# Altium PCB zulu_a7.PcbDoc (part 3 of 4)
Units mm, origin at the board's own origin, x right, y up, seen from the top; angles counter-clockwise.
Board outline 69.85 x 25.4 mm, 6 copper layers (Top Layer, L2-GND, L3-SIG, L4-SIG, L5-VCC3V3, Bottom Layer), stack 1.65 mm thick; 178 components, 177 nets, 839 pads, 534 vias.
Unrouted connection lines stored in the file: 46.
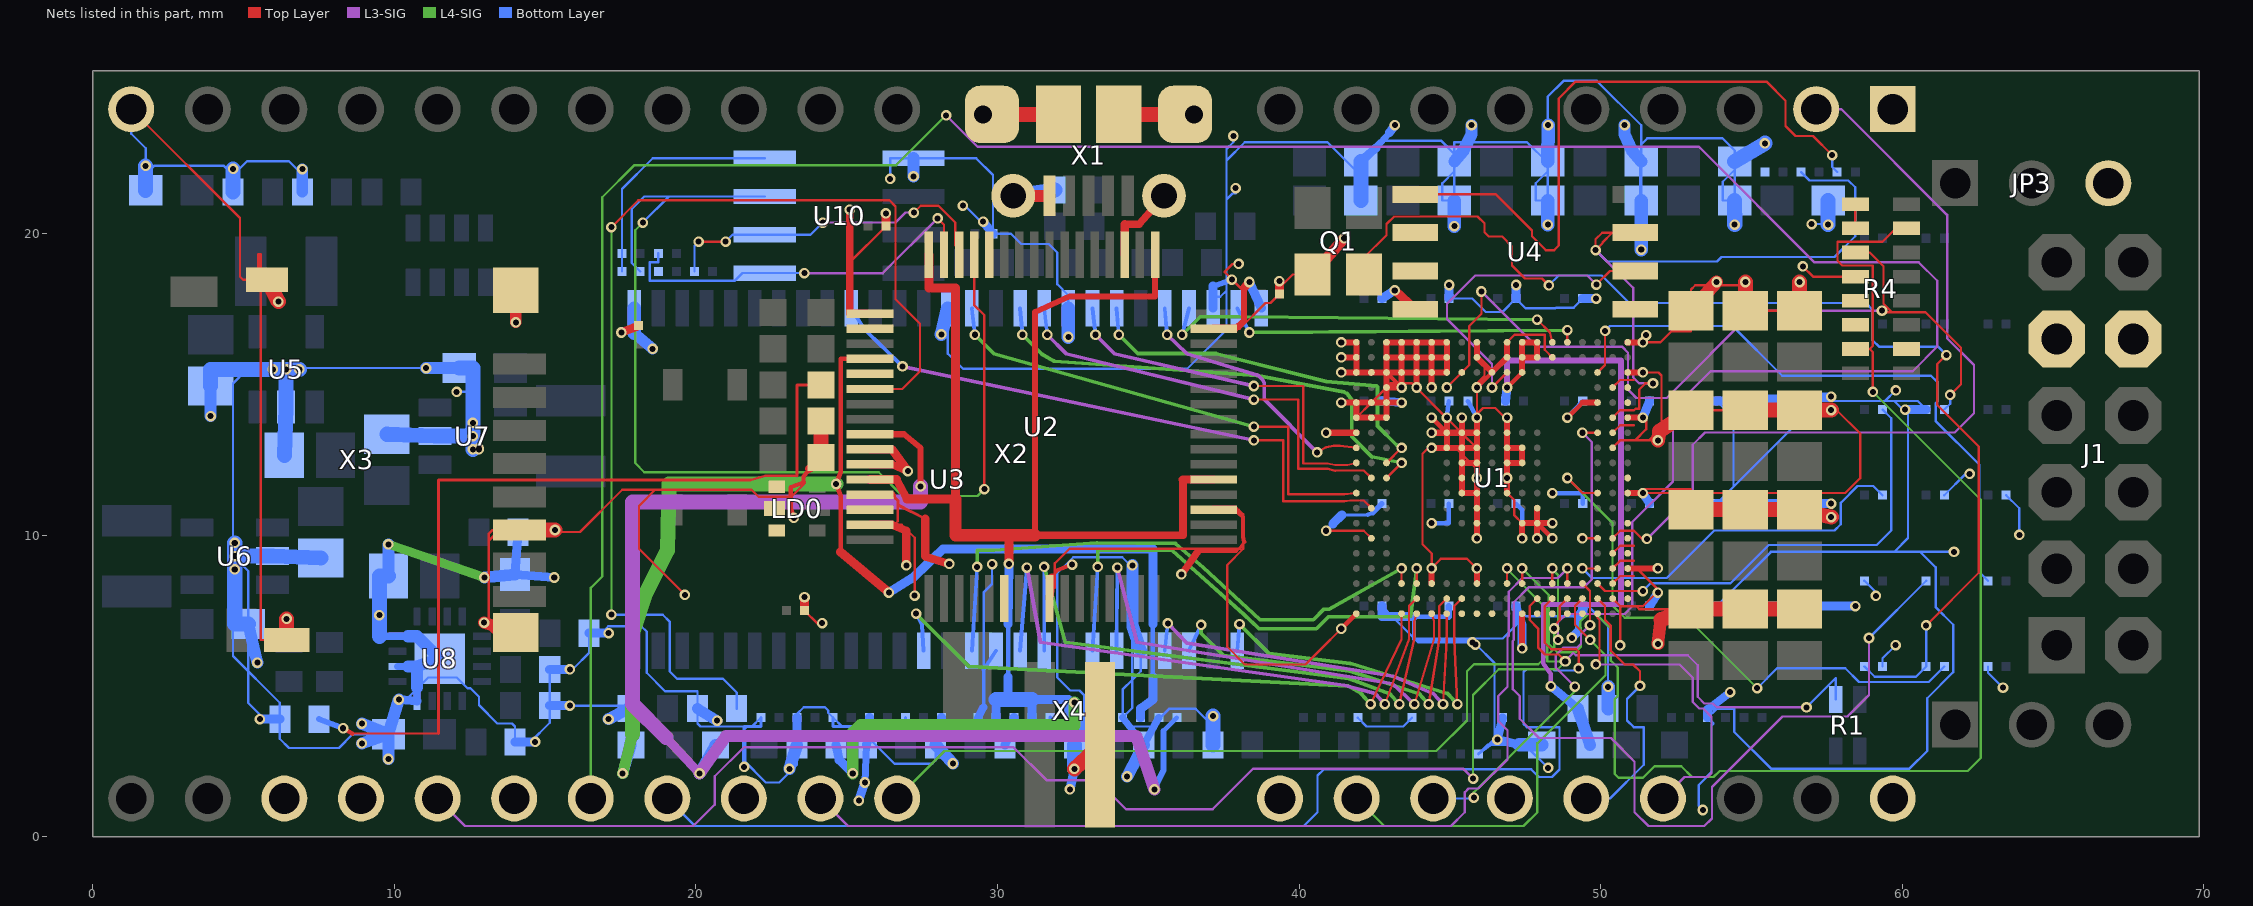
[diagram p6: the nets of this part, all layers, seen from the top]

## Via types
v1: diameter 0.35, hole 0.2, Top Layer to Bottom Layer, tented both sides, 534 vias

## Nets (pads, with @x,y where several pads share a name; then routed paths per layer and width w, separated by ;. In a path a pad name is that pad's centre, name@x,y a point inside that pad or via, vN(x,y) a via of type N, cw(c..) or ccw(c..) an arc to the next point about the centre after c; other vN are vias at no path point) (continued)
CHAN14: U1.W17 X2.24 | length 10.6
  Top Layer w0.076: v1(49.847,5.715) 49.968,5.836 49.968,7.196 49.9,7.264 U1.W17@49.9,7.4
  L3-SIG w0.076: v1(49.847,5.715) 52.624,5.715 53.056,5.283 53.056,4.47 53.27,4.256 53.402,4.256 53.681,3.977 53.681,2.119 53.543,1.981 52.781,1.981 X2.24@52.07,1.27
CHAN15: U1.V17 X2.25 | length 9.2
  Top Layer w0.076: U1.V17@49.9,7.9 50.15,7.65 50.15,7.187 50.343,6.995 50.343,6.172 50.8,5.715 51.079,5.715 51.308,5.486 v1(51.308,5.004)
  Bottom Layer w0.076: X2.25@49.53,1.27 50.317,1.27 51.435,2.388 51.435,3.632 51.105,3.632 50.876,3.861 50.876,4.572 v1(51.308,5.004)
CHAN16: U1.W16 X2.26
CHAN17: U1.U16 X2.27 | length 11
  Top Layer w0.076: U1.U16@49.4,8.4 49.65,8.15 v1(49.65,7.02)
  L3-SIG w0.076: v1(49.149,4.978) 48.514,5.613 48.514,6.02 48.768,6.274 49.227,6.274 49.354,6.401 49.354,6.724 v1(49.65,7.02)
  L4-SIG w0.076: v1(45.796,1.295) 45.796,1.473 49.149,4.826 v1(49.149,4.978)
  Bottom Layer w0.076: X2.27@44.45,1.27 45.771,1.27 v1(45.796,1.295)
CHAN18: U1.V16 X2.28 | length 15.1
  Top Layer w0.076: U1.V16@49.4,7.9 49.15,7.65 49.15,7.187 49.15,7.035 v1(49.657,6.528)
  L4-SIG w0.076: X2.28@41.91,1.27 42.824,0.356 47.447,0.356 47.904,0.813 47.904,3.099 50.165,5.359 50.165,6.02 v1(49.657,6.528)
CHAN19: U1.W15 X2.29
CHAN20: U1.V15 X2.30 | length 26.6
  Top Layer w0.076: v1(48.463,6.909) 48.463,7.001 48.65,7.187 48.65,7.65 U1.V15@48.9,7.9
  L4-SIG w0.076: X2.30@26.67,1.27 28.245,2.845 44.552,2.845 45.568,3.861 45.568,5.486 45.801,5.719 47.934,5.719 48.463,6.248 v1(48.463,6.909)
CHAN21: U1.U15 X2.31 | length 33.1
  Top Layer w0.076: U1.U15@48.9,8.4 v1(48.9,8.9)
  L3-SIG w0.076: X2.31@24.13,1.27 25.044,0.356 45.036,0.356 45.493,0.813 45.493,1.473 45.618,1.599 45.947,1.599 46.914,2.565 46.914,3.534 46.611,3.837 46.611,4.672 46.914,4.975 46.914,6.629 46.953,6.669 46.953,8.128 47.41,8.585 48.585,8.585 v1(48.9,8.9)
CHAN22: U1.W14 X2.32
CHAN23: U1.V14 X2.33 | length 41.3
  Top Layer w0.076: U1.V14@48.4,7.9 48.15,7.65 48.15,7.187 48.15,6.434 48.362,6.223 49.195,6.223 49.276,6.142 v1(49.276,5.588)
  Bottom Layer w0.076: X2.33@19.05,1.27 19.964,0.356 40.157,0.356 40.615,0.813 40.615,2.032 40.818,2.235 47.701,2.235 47.955,1.981 48.387,1.981 48.641,2.235 48.641,3.632 47.549,3.632 47.447,3.734 47.447,5.461 47.549,5.563 48.412,5.563 48.463,5.512 49.2,5.512 v1(49.276,5.588)
CHAN24: U1.U14 X2.34 | length 92.9
  Top Layer w0.076: U1.U14@48.4,8.4 v1(48.4,8.9)
  L3-SIG w0.076: v1(28.296,23.927) 29.337,22.885 53.264,22.885 57.099,19.05 60.554,19.05 61.163,18.44 61.163,16.256 60.35,15.443 53.645,15.443 52.4,14.199 52.4,11.786 51.054,10.439 51.054,7.645 50.8,7.391 48.87,7.391 48.59,7.112 v1(48.59,6.528)
  L4-SIG w0.076: X2.34@16.51,1.27 16.51,8.255 16.891,8.636 16.891,21.209 17.958,22.276 26.645,22.276 v1(28.296,23.927) ; v1(48.4,8.9) 48.387,8.887 48.59,8.684 v1(48.59,6.528)
CHAN25: U1.W13 X2.35
CHAN26: U1.V13 X2.36 | length 47.2
  Top Layer w0.076: U1.V13@47.9,7.9 47.65,7.65 47.65,7.187 47.93,6.908 47.93,6.274 48.158,6.045 48.616,6.045 v1(48.844,5.817)
  L3-SIG w0.076: X2.36@11.43,1.27 12.344,0.356 19.914,0.356 20.625,1.067 20.625,2.007 21.59,2.972 30.531,2.972 31.623,1.88 33.299,1.88 34.265,0.914 37.135,0.914 38.481,2.261 45.441,2.261 v1(45.771,1.93)
  L4-SIG w0.076: v1(45.771,1.93) 45.771,4.699 46.625,5.553 48.581,5.553 v1(48.844,5.817)
CHAN27: U1.T18 X2.37 | length 0.8
  Top Layer w0.076: U1.T18@50.4,8.9 50.65,9.15 51.113,9.15
CHAN28: U1.R19 X2.38
CHAN-CLK: U1.P18 X2.2 | length 27.6
  Top Layer w0.076: U1.P18@50.4,9.9 50.65,10.15 51.113,10.15 51.382,9.881 v1(51.537,9.881)
  L3-SIG w0.076: v1(51.537,9.881) 53.061,11.405 53.061,13.005 53.467,13.411 61.747,13.411 62.382,14.046 62.382,15.646 61.493,16.535 61.493,20.625 57.988,24.13 X2.2@57.15,24.13
CKE: U1.M2 U3.37 | length 20.5
  Top Layer w0.076: v1(38.5,13.15) 39.479,13.15 39.479,11.13 41.5,11.13 41.687,11.15 42.15,11.15 U1.M2@42.4,10.9
  L3-SIG w0.125: v1(26.85,15.6) v1(38.5,13.15)
  Bottom Layer w0.125: U3.37@25.15,17.53 25.575,16.85 v1(26.85,15.6)
CLK-12M-FPGA: R25.2 U1.L17 | length 18.9
  Top Layer w0.076: v1(48.9,11.9) 49.4,11.4 U1.L17@49.9,11.4
  L4-SIG w0.076: v1(48.9,11.9) 50.394,10.406 50.394,7.671 50.8,7.264 52.857,7.264 v1(55.194,4.928)
  Bottom Layer w0.076: v1(55.194,4.928) 55.855,5.588 58.115,5.588 58.572,5.131 60.881,5.131 R25.2@61.4,5.65
CLK-12M-FT: R24.2 U2.2 | length 0.9
  Bottom Layer w0.076: R24.2@59.35,5.65 59.35,5.919 v1(59.787,6.356)
CLK-12M-SHARED: Q1.3 R24.1 R25.1 | length 38
  Top Layer w0.076: Q1.3@42.15,18.65 42.15,19.202 42.901,19.953 42.901,20.32 43.155,20.574 45.923,20.574 46.152,20.345 46.152,20.047 46.291,19.908 46.736,19.908 47.066,19.578 47.066,18.948 47.498,18.517 48.057,18.517 v1(48.285,18.288) ; v1(60.8,7.01) 62.546,8.756 62.546,12.943 61.168,14.321 61.168,15.677 v1(61.468,15.977)
  Bottom Layer w0.076: v1(48.285,18.288) 48.614,18.617 50.04,18.617 50.952,17.704 58.801,17.704 59.03,17.475 59.03,16.459 59.233,16.256 61.189,16.256 v1(61.468,15.977) ; R24.1@58.75,5.65 59.091,5.309 60.459,5.309 R25.1@60.8,5.65 v1(60.8,7.01)
D0: U1.V8 U3.2 | length 12.4
  Top Layer w0.076: v1(45.25,4.4) 45.15,6.55 45.15,7.187 45.15,7.65 U1.V8@45.4,7.9
  L4-SIG w0.125: v1(38.025,7.05) 39,6.075 41.7,5.75 44.925,4.75 v1(45.25,4.4)
  Bottom Layer w0.125: U3.2@37.95,6.17 v1(38.025,7.05)
D1: U1.V7 U3.4 | length 13
  Top Layer w0.076: v1(44.3,4.4) 44.65,6.55 44.65,7.187 44.65,7.65 U1.V7@44.9,7.9
  L4-SIG w0.125: v1(36.75,7.025) 36.75,6.75 37.475,6.025 41.675,5.5 43.975,4.75 v1(44.3,4.4)
  Bottom Layer w0.125: U3.4@36.35,6.17 v1(36.75,7.025)
D2: U1.W7 U3.5 | length 13.7
  Top Layer w0.076: v1(44.775,4.4) 44.9,6.55 U1.W7@44.9,7.4
  L3-SIG w0.125: v1(35.65,7.075) 36.275,6.425 43.125,5.325 44.45,4.75 v1(44.775,4.4)
  Bottom Layer w0.125: U3.5@35.55,6.17 v1(35.65,7.075)
D3: U1.W6 U3.7 | length 18
  Top Layer w0.076: v1(43.825,4.4) 44.475,6.55 44.475,7.15 U1.W6@44.4,7.4
  L3-SIG w0.125: v1(33.975,8.925) 34.625,6.45 43.1,5.075 v1(43.825,4.4)
  Bottom Layer w0.125: U3.7@33.95,6.17 v1(33.975,8.925)
D4: U1.U5 U3.8 | length 17
  Top Layer w0.076: U1.U5@43.9,8.4 v1(43.9,8.9)
  L4-SIG w0.125: v1(33.325,8.95) 33.325,9.5 35.8,9.5 38.175,7.375 38.675,6.9 40.575,6.9 40.975,7.3 43.675,7.3 43.7,7.325 v1(43.9,8.9)
  Bottom Layer w0.125: U3.8@33.15,6.17 v1(33.325,8.95)
D5: U1.W5 U3.10 | length 19.8
  Top Layer w0.076: v1(43.325,4.4) 43.825,6.55 43.825,7.15 U1.W5@43.9,7.4
  L4-SIG w0.125: v1(31.55,8.95) 32.25,6.45 41.65,5.25 43,4.75 v1(43.325,4.4)
  Bottom Layer w0.125: U3.10@31.55,6.17 v1(31.55,8.95)
D6: U1.V5 U3.11 | length 20.7
  Top Layer w0.076: v1(42.85,4.4) 43.65,6.55 43.65,7.187 43.65,7.65 U1.V5@43.9,7.9
  L3-SIG w0.125: v1(30.975,8.925) 31.425,6.45 41.5,5.025 42.525,4.75 v1(42.85,4.4)
  Bottom Layer w0.125: U3.11@30.75,6.17 v1(30.975,8.925)
D7: U1.U4 U3.13 | length 19.4
  Top Layer w0.076: U1.U4@43.4,8.4 v1(43.4,8.9)
  L4-SIG w0.125: v1(29.325,8.95) 29.325,9.5 29.875,9.5 33.3,9.75 35.9,9.725 36.825,8.925 38.7,7.2 40.475,7.2 40.825,7.55 41,7.55 v1(43.4,8.9)
  Bottom Layer w0.125: U3.13@29.15,6.17 v1(29.325,8.95)
D8: U1.L1 U3.42 | length 16.4
  Top Layer w0.076: v1(38.5,13.6) 39.645,13.6 39.645,11.36 41.5,11.36 U1.L1@41.9,11.4
  L4-SIG w0.125: v1(29.25,16.65) 29.875,16.025 v1(38.5,13.6)
  Bottom Layer w0.125: U3.42@29.15,17.53 v1(29.25,16.65)
D9: U1.K3 U3.44 | length 16.2
  Top Layer w0.076: U1.K3@42.9,11.9 v1(43.4,12.4)
  L4-SIG w0.125: v1(30.825,16.65) 31.45,16.025 31.875,15.775 38.6,15.3 41.5,14.75 41.6,14.7 41.75,14.5 41.75,13.275 42.425,12.6 v1(43.4,12.4)
  Bottom Layer w0.125: U3.44@30.75,17.53 v1(30.825,16.65)
D10: U1.K2 U3.45 | length 14.5
  Top Layer w0.076: v1(38.5,14.5) 39.978,14.5 39.978,12.21 40.9,12.21 40.95,12.205 41.2,12.14 41.687,12.15 42.15,12.15 U1.K2@42.4,11.9
  L3-SIG w0.125: v1(31.65,16.65) 32.275,16.025 v1(38.5,14.5)
  Bottom Layer w0.125: U3.45@31.55,17.53 v1(31.65,16.65)
D11: U1.J1 U3.47 | length 12.5
  Top Layer w0.076: v1(38.5,14.95) 40.145,14.95 40.145,12.38 40.95,12.38 41.2,12.33 41.6,12.33 U1.J1@41.9,12.4
  L3-SIG w0.125: v1(33.25,16.65) 33.875,16.025 v1(38.5,14.95)
  Bottom Layer w0.125: U3.47@33.15,17.53 v1(33.25,16.65)
D12: U1.J3 U3.48 | length 12.9
  Top Layer w0.076: U1.J3@42.9,12.4 v1(43.4,12.9)
  L4-SIG w0.125: v1(34.025,16.65) 34.65,16.025 37.25,16.025 40.9,15.1 42.575,14.95 42.6,14.925 42.6,13.625 43.225,13 v1(43.4,12.9)
  Bottom Layer w0.125: U3.48@33.95,17.53 v1(34.025,16.65)
D13: U1.H1 U3.50 | length 9
  Top Layer w0.076: v1(40.6,12.75) 40.9,12.92 41.15,12.97 41.35,12.97 U1.H1@41.9,12.9
  L3-SIG w0.125: v1(35.625,16.65) 36.275,16.025 38.65,15.3 38.8,15.15 38.85,15.05 38.85,14.5 v1(40.6,12.75)
  Bottom Layer w0.125: U3.50@35.55,17.53 v1(35.625,16.65)
D14: U1.A14 U3.51 | length 13.9
  Top Layer w0.076: v1(47.9,17.15) 48.325,16.725 U1.A14@48.4,16.4
  L4-SIG w0.125: v1(36.125,16.65) 36.725,17.25 38,17.25 v1(47.9,17.15)
  Bottom Layer w0.125: v1(36.125,16.65) U3.51@36.35,17.53
D15: U1.A15 U3.53 | length 11.8
  Top Layer w0.076: U1.A15@48.9,16.4 v1(48.9,16.8)
  L4-SIG w0.125: v1(38.35,16.725) v1(48.9,16.8)
  Bottom Layer w0.125: U3.53@37.95,17.53 v1(38.35,16.725)
DONE: R4.2 U2.22
DONE-PU: R4.9 R4.10 | length 0.8
  Top Layer w0.076: R4.10@58.45,20.178 R4.9@58.45,20.978
EE-CLK: R96.1 U2.62 U10.2 | length 11.5
  Top Layer w0.076: v1(20.091,19.736) v1(20.98,19.736) ; v1(27.229,20.701) 27.457,20.93 28.042,20.93 28.6,20.371 28.6,19.609 28.725,19.609 U2.62@28.725,19.3
  L3-SIG w0.076: v1(24.206,20.371) 26.619,20.371 26.949,20.701 v1(27.229,20.701)
  Bottom Layer w0.076: R96.1@19.95,18.75 19.95,19.594 v1(20.091,19.736) ; v1(20.98,19.736) 21.21,19.965 U10.2@22.285,19.965 23.8,19.965 v1(24.206,20.371)
EE-CS: R98.1 U2.63 U10.1 | length 12.9
  Top Layer w0.076: v1(28.011,20.508) 28.225,20.295 U2.63@28.225,19.3
  L3-SIG w0.076: v1(23.597,18.694) 26.197,18.694 v1(28.011,20.508)
  Bottom Layer w0.076: R98.1@18.75,19.35 18.75,19.05 18.466,19.05 18.466,18.437 21.281,18.437 21.539,18.695 U10.1@22.285,18.695 v1(23.597,18.694)
EE-DATA: R101.2 U2.61 U10.3 | length 36.1
  Top Layer w0.076: U2.61@29.225,19.3 29.225,17.638 29.566,17.297 v1(29.566,11.532)
  L4-SIG w0.076: v1(18.237,20.371) 17.983,20.117 17.983,12.395 18.288,12.09 26.06,12.09 26.848,11.303 29.337,11.303 v1(29.566,11.532)
  Bottom Layer w0.076: R101.2@18.15,18.75 17.868,19.032 17.868,20.815 18.288,21.235 19.101,21.235 ; v1(18.237,20.371) 19.101,21.235 ; U10.3@22.285,21.235 19.101,21.235
EE-DATA-DO: R97.1 R101.1 U10.4 | length 7.9
  Bottom Layer w0.076: R101.1@17.55,18.75 R97.1@17.55,19.35 17.55,21.488 18.567,22.505 U10.4@22.285,22.505
FLASH-CS#: R7.1 U1.K19 U4.1 | length 22
  Top Layer w0.076: U4.1@43.85,21.305 46.533,21.305 47.727,20.111 47.727,19.914 48.184,19.456 48.463,19.456 48.614,19.607 48.614,24.486 49.173,25.044 55.499,25.044 56.134,24.409 56.134,23.571 56.464,23.241 57.048,23.241 v1(57.683,22.606)
  Bottom Layer w0.076: v1(57.683,22.606) 57.683,22.216 R7.1@57.849,22.05
FLASH-D00: U1.D18 U4.5 | length 0.8
  Top Layer w0.076: U1.D18@50.4,14.9 50.65,15.15 51.113,15.15
FLASH-D01: U1.D19 U4.2
FLASH-D02: R2.1 U1.G18 U4.3 | length 0.8
  Top Layer w0.076: U1.G18@50.4,13.4 50.65,13.65 51.113,13.65
FLASH-D03: R6.1 U1.F18 U4.7 | length 23
  Top Layer w0.076: U1.F18@50.4,13.9 50.65,14.15 51.113,14.15 51.161,14.199 51.283,14.199 51.283,14.834 51.486,15.037 v1(51.74,15.037) ; U4.7@51.15,20.035 50.388,20.035 ; 50.388,20.035 50.053,20.035 49.835,19.816 v1(49.835,19.456) 50.063,19.685 50.063,19.71 50.388,20.035
  L3-SIG w0.076: v1(49.835,19.456) 51.079,18.212 51.079,15.24 51.283,15.037 v1(51.74,15.037)
  Bottom Layer w0.076: v1(49.835,19.456) 50.214,19.077 53.864,19.077 54.014,19.228 57.76,19.228 58.445,19.914 58.445,21.539 58.217,21.768 56.931,21.768 R6.1@56.649,22.05
FPGA-CCLK: U1.C11 U4.6 | length 11
  Top Layer w0.076: v1(46.4,14.9) U1.C11@46.9,15.4 ; v1(49.86,18.313) 50.312,18.765 U4.6@51.15,18.765
  L3-SIG w0.076: v1(46.4,14.9) 46.4,15.677 44.907,17.17 44.907,17.678 45.847,18.618 49.555,18.618 v1(49.86,18.313)
FPGA-DONE: R4.7 R4.15 U1.U12 | length 47.2
  Top Layer w0.076: U1.U12@47.4,8.4 v1(47.4,8.9) ; R4.15@58.45,16.178 58.928,16.178 ; v1(59.03,14.757) 59.03,16.076 58.928,16.178 ; R4.7@60.15,20.178 59.792,20.178 59.349,19.736 57.861,19.736 57.861,19.101 58.014,18.948 59.03,18.948 59.03,16.28 58.928,16.178
  L4-SIG w0.076: v1(47.4,8.9) 48.285,8.015 48.285,6.401 48.565,6.121 49.175,6.121 49.353,6.299 49.353,6.934 49.327,6.961 49.327,7.137 49.581,7.391 49.86,7.391 50.343,6.909 50.343,5.842 50.571,5.613 50.571,4.674 50.47,4.572 50.47,2.083 50.597,1.956 51.41,1.956 51.791,2.337 52.68,2.337 53.035,1.981 53.746,1.981 53.95,2.184 62.179,2.184 62.611,2.616 62.611,11.176 v1(59.03,14.757)
FPGA-INIT#: R1.1 U1.U11 | length 16.3
  Top Layer w0.076: U1.U11@46.9,8.4 v1(46.9,8.9)
  L3-SIG w0.076: v1(48.819,5.817) 49.098,6.096 49.174,6.02 52.892,6.02 53.222,5.69 53.222,4.642 53.442,4.422 53.721,4.422 53.85,4.293 v1(56.83,4.293)
  L4-SIG w0.076: v1(46.9,8.9) 46.888,8.888 48.235,7.542 48.235,5.817 v1(48.819,5.817)
  Bottom Layer w0.076: v1(56.83,4.293) 57.8,5.262 R1.1@57.8,4.55
FPGA-TCK: R4.11 R5.2 U1.C8 | length 28.5
  Top Layer w0.076: v1(44.9,14.9) U1.C8@45.4,15.4 45.644,15.644 45.644,16.942 46.05,17.348 v1(46.05,18.085) ; R4.11@58.45,19.378 58.928,19.378 59.385,18.921 59.385,17.678 59.665,17.399 ; v1(59.334,17.45) 59.385,17.399 59.665,17.399 ; v1(61.595,14.656) 61.951,15.011 61.951,16.223 60.774,17.399 59.665,17.399
  L3-SIG w0.076: v1(46.05,18.085) 47.879,16.256 50.71,16.256 50.913,16.053 50.913,14.834 51.193,14.554 52.197,14.554 55.093,17.45 v1(59.334,17.45)
  Bottom Layer w0.076: R5.2@61.4,14.17 61.595,14.365 v1(61.595,14.656)
FPGA-TDI: R4.14 U1.W10
FPGA-TDO: R4.13 U1.W8
FPGA-TMS: R4.12 U1.W9 | length 1.9
  Top Layer w0.076: v1(56.708,18.915) 57.044,18.578 R4.12@58.45,18.578
FT-PWREN#: U1.P17 U2.60 | length 0.5
  Top Layer w0.076: v1(49.4,9.9) U1.P17@49.9,9.9
FT-REF: R18.2 U2.6 | length 37.2
  Top Layer w0.076: v1(17.196,20.218) 18.085,21.107 26.416,21.107 26.619,20.904 26.619,17.831 27.432,17.018 27.432,15.443 26.839,14.85 U2.6@25.775,14.85
  L4-SIG w0.076: v1(17.196,7.366) v1(17.196,20.218)
  Bottom Layer w0.076: v1(17.196,7.366) 18.898,7.366 19.126,7.137 19.126,5.486 19.368,5.244 20.892,5.244 21.35,4.787 R18.2@21.35,4.25
FT-RESETN: R19.1 U2.14
FT-VCORE: C139.2 C152.2 C153.2 C154.2 U2.12 U2.37 U2.49 U2.64 | length 57.3
  Top Layer w0.2: 31.237,10 31.237,17.4 32.4,17.92 35.225,17.92 U2.49@35.225,19.3
  Top Layer w0.26: 31.237,10 36.15,10 36.15,11.85
  Top Layer w0.275: 26.65,11.85 27,11.2
  Top Layer w0.28: 36.15,11.85 U2.37@37.175,11.85
  Top Layer w0.3: U2.12@25.775,11.85 26.65,11.85 ; 27,11.2 28.6,11.2 28.6,18.2 27.725,18.2 U2.64@27.725,19.3 ; v1(30.375,9.05) 30.375,10
  Top Layer w0.4: 28.6,11.2 28.6,10 30.375,10 31.237,10
  L4-SIG w0.39: v1(25.2,2.1) 25.2,3.45
  L4-SIG w0.4: 25.2,3.45 25.45,3.7 32.55,3.7 v1(32.55,4.45)
  Bottom Layer w0.15: 30.35,5.3 30.35,7.05
  Bottom Layer w0.29: 24.75,2.55 v1(25.2,2.1)
  Bottom Layer w0.3: C139.2@24.65,3.05 24.75,2.55 ; C152.2@29.949,3.95 29.949,4.55 ; 30.35,4.55 30.35,5.3 ; 30.35,7.05 v1(30.375,9.05) ; C153.2@31.149,3.95 31.149,4.55 32.349,4.55 ; C154.2@32.349,3.95 32.349,4.55 ; v1(32.55,4.45) 32.349,4.55
  Bottom Layer w0.5: 29.949,4.55 30.35,4.55 31.149,4.55
FT-VPHY: C40.2 L4.1 U2.4 | length 41
  Top Layer w0.15: 24.8,9.45 24.8,11.3 v1(24.65,11.7) 24.8,12.1 24.8,15.85 U2.4@25.775,15.85
  Top Layer w0.3: 24.8,9.45 v1(26.4,8.1)
  L4-SIG w0.37: v1(17.57,2.1) 17.9,3.4
  L4-SIG w0.5: 17.9,3.4 17.9,6.8 18.3,8 19.05,9.5 19.1,11.7 v1(24.65,11.7)
  Bottom Layer w0.15: 35.15,5.3 35.15,7.05
  Bottom Layer w0.3: v1(26.4,8.1) 27.2,8.6 28.2,9.55 35.15,9.55 35.15,7.05 ; C40.2@34.749,3.95 34.749,4.25 35.15,4.55 35.15,5.3
  Bottom Layer w0.37: v1(17.57,2.1) L4.1@17.85,3.05
FT-VPLL: C41.2 L5.1 U2.9 | length 43.8
  Top Layer w0.2: U2.9@25.775,13.35 26.9,13.35 27.45,12.9 v1(27.45,11.625)
  L3-SIG w0.3: 19,3.3 v1(20.12,2.1)
  L3-SIG w0.39: v1(20.12,2.1) 21,3.35
  L3-SIG w0.4: 21,3.35 34.6,3.35 v1(35.2,1.575)
  L3-SIG w0.5: 19,3.3 17.9,4.4 17.9,11.1 27.45,11.1 v1(27.45,11.625)
  Bottom Layer w0.15: 35.5,3.5 C41.2@35.949,3.95
  Bottom Layer w0.2: v1(35.2,1.575) 35.5,2.2 35.5,3.5
  Bottom Layer w0.39: v1(20.12,2.1) L5.1@20.65,3.05
GND: C3.1 C4.1 C5.1 C6.1 C7.1 C8.1 C9.1 C11.1 C12.1 C13.1 C38.1 C40.1 C41.1 C78.1 C80.1 C82.1 C84.1 C85.2 C86.2 C87.2 C88.2 C89.2 C90.2 C91.2 C92.2 C93.2 C94.2 C95.2 C96.2 C97.2 C98.2 C99.2 C100.2 C101.2 C102.2 C103.2 C104.2 C105.2 C106.2 C107.2 C108.2 C109.2 C110.2 C111.2 C112.2 C113.2 C114.2 C115.2 C116.2 C117.2 C118.2 C119.2 C120.2 C121.2 C122.2 C133.1 C134.1 C135.1 C136.1 C137.1 C138.1 C139.1 C140.2 C141.2 C142.2 C143.2 C144.2 C145.2 C146.2 C147.1 C148.1 C149.1 C150.1 C151.1 C152.1 C153.1 C154.1 C155.1 C156.1 C157.1 C158.1 C159.1 J1.5 J1.11 JP3.3 L6.1 LD1.K LD2.K Q1.2 R5.1 R11.1 R13.2 R15.1 R17.2 R18.1 R21.1 R22.1 R78.1 R86.1 R102.1 R103.1 R104.1 R105.1 R106.1 U1.A1 U1.A3 U1.A4 U1.A5 U1.A6 U1.A7 U1.A9 U1.A11 U1.A19 U1.B1 U1.B3 U1.B4 U1.B5 U1.B6 U1.B7 U1.B9 U1.B11 U1.B14 U1.C1 U1.C2 U1.C3 U1.C4 U1.C5 U1.C6 U1.C7 U1.C10 U1.C19 U1.D3 U1.E1 U1.E2 U1.E3 U1.E17 U1.F1 U1.F2 U1.F3 U1.F19 U1.G1 U1.G7 U1.G8 U1.G9 U1.G11 U1.H7 U1.H8 U1.H9 U1.H11 U1.H12 U1.H18 U1.J8 U1.J9 U1.J11 U1.J12 U1.K8 U1.L8 U1.L9 U1.L11 U1.L19 U1.M9 U1.M13 U1.N9 U1.N12 U1.N13 U1.P2 U1.T19 U1.U6 U1.U9 U1.V18 U1.W1 U1.W12 U2.1 U2.5 U2.10 U2.11 U2.13 U2.15 U2.25 U2.35 U2.47 U2.51 U3.6 U3.12 U3.28 U3.41 U3.46 U3.52 U3.54 U4.4 U5.2 U6.2 U7.2 U8.4 U8.6 U8.8 U8.17 U10.5 X1.5 X1.MH1 X1.MH2 X1.MP1 X1.MP2 X1.MP3 X1.MP4 X1.MS1 X1.MS2 X2.1 X2.20 X2.21 X3.6 X3.G1 X3.G2 X3.G3 X3.G4 X4.2 | length 688.8
  Top Layer w0.076: X2.20@1.27,24.13 4.877,20.523 4.877,18.577 4.978,18.475 X3.G3@5.486,18.475 ; X3.G3@5.775,18.475 X3.G3@5.563,18.475 ; X3.G2@6.425,6.525 5.563,6.525 X3.G3@5.563,18.475 ; X3.G1@14.025,6.775 13.266,6.775 13.132,6.909 v1@13.132,7.1 ; X3.6@14.15,10.175 13.248,10.175 13.132,10.058 v1@13.132,7.1 ; v1(19.634,8.026) 18.11,9.55 18.11,10.973 18.644,11.506 ; C159.1@23.6,7.5 24.013,7.087 v1(24.181,7.087) ; LD1.K@24.15,12.585 23.571,12.006 23.571,11.684 23.165,11.278 22.073,11.278 21.844,11.506 18.644,11.506 ; U2.15@25.775,10.35 26.5,10.35 26.581,10.35 ; U2.13@25.775,11.35 26.5,11.35 26.594,11.35 26.594,11.227 26.695,11.125 26.695,10.465 26.581,10.35 ; U2.1@25.775,17.35 25.1,17.35 25.095,17.35 25.095,19.045 C155.1@26.3,20.25 ; v1(27.254,8.001) 27.254,9.918 26.822,10.35 26.581,10.35 ; U2.25@31.725,7.9 31.725,8.255 31.902,8.255 31.902,9.068 32.385,9.55 38.049,9.55 38.151,9.652 ; U2.35@37.175,10.85 37.85,10.85 37.998,10.85 38.151,10.698 38.151,9.743 38.151,9.652 ; U2.47@37.175,16.85 U2.47@37.846,16.85 ; 37.93,9.47 38.056,9.622 38.18,9.78 ; v1(37.998,18.999) 37.795,18.999 37.541,18.745 37.541,18.72 38.176,18.085 38.176,17.18 U2.47@37.846,16.85 ; Q1.2@40.45,18.65 39.788,18.65 39.35,18.212 C157.1@39.35,18 39.054,17.704 38.887,17.704 38.034,16.85 U2.47@37.846,16.85 ; v1(40.9,10.15) 42.15,10.15 U1.P2@42.4,9.9 ; U1.W1@41.9,7.4 40.215,5.715 38.202,5.715 37.617,6.299 37.617,9.017 38.151,9.55 38.151,9.652 ; U1.F1@41.9,13.9 U1.E2@42.4,14.4 U1.D3@42.9,14.9 43.037,15.037 43.748,15.037 43.892,14.892 44.893,13.892 44.9,13.885 45.385,13.4 45.392,13.392 45.885,12.9 45.9,12.885 U1.J9@45.9,12.4 ; U1.U6@44.4,8.4 v1(44.4,8.9) v1@44.4,8.916 ; U1.U9@45.9,8.4 45.9,8.888 45.568,9.22 44.704,9.22 v1@44.4,8.916 ; U1.N9@45.9,10.4 U1.M9@45.9,10.9 U1.L9@45.9,11.4 v1(45.9,11.9) ; U1.B9@45.9,15.9 46.152,15.648 46.152,15.291 45.9,15.039 v1(45.9,14.9) v1@45.9,14.021 ; U1.A11@46.9,16.4 47.15,16.65 48.15,16.65 48.15,16.15 U1.B14@48.4,15.9 ; U1.N12@47.4,10.4 47.142,10.658 47.142,11.158 U1.L11@46.9,11.4 v1(46.9,11.9) U1.J11@46.9,12.4 U1.H11@46.9,12.9 U1.G11@46.9,13.4 46.9,13.831 46.507,14.224 46.103,14.224 v1@45.9,14.021 ; v1(50.65,6.35) 50.65,7.65 U1.V18@50.4,7.9 50.655,7.645 51.187,7.645 ; U1.T19@50.9,8.9 51.206,8.9 51.892,8.214 51.892,8.128 51.41,7.645 51.187,7.645 ; U1.L19@50.9,11.4 v1@51.278,11.4 ; U1.F19@50.9,13.9 51.391,13.834 51.511,13.818 51.511,13.513 51.156,13.157 ; U1.C19@50.9,15.4 v1(51.4,15.4) 51.918,15.4 52.019,15.298 52.019,13.564 51.613,13.157 ; U1.A19@50.9,16.4 v1(51.4,16.4) v1@51.477,16.4 ; v1(51.511,16.637) 51.511,16.434 v1@51.477,16.4 ; v1(51.9,13.15) 50.65,13.15 U1.H18@50.4,12.9 50.657,13.157 51.156,13.157 ; C140.2@53,7.55 51.283,7.55 51.187,7.645 ; C143.2@53,10.849 C143.2@53,11.4 ; C98.2@56.6,17.449 C97.2@54.8,17.449 54.8,18.186 54.695,18.292 53.141,18.292 53,18.151 C93.2@53,17.449 53,16.764 52.349,16.764 51.985,16.4 v1@51.477,16.4 ; X3.G3@5.486,18.475 5.486,19.329 5.563,19.329 X3.G3@5.563,18.475 ; X3.G3@5.486,18.475 X3.G3@5.563,18.475 ; v1@13.132,7.1 13.132,9.83 13.411,10.109 15.325,10.109 16.154,10.109 17.551,11.506 18.644,11.506 ; v1@44.4,8.916 44.4,9.398 44.094,9.704 44.094,12.7 44.298,12.903 45.189,12.903 45.4,12.692 45.9,12.192 ; v1(45.9,11.9) U1.J9@45.9,12.4 ; v1(45.9,11.9) 45.9,12.192 ; 45.9,12.192 U1.J9@45.9,12.4 ; U1.J9@45.9,12.4 U1.H9@45.9,12.9 U1.G9@45.9,13.4 v1(45.9,13.9) v1@45.9,14.021 ; 51.156,13.157 51.613,13.157 ; v1@51.278,11.4 51.41,11.532 53,11.532 C143.2@53,11.4 ; v1@51.278,11.4 C143.2@53,11.4 ; 51.613,13.157 51.892,13.157 52.884,14.149 C146.2@53,14.149 C85.2@54.8,14.149 C86.2@56.6,14.149 57.835,14.149 58.61,13.374 58.61,11.895 58.115,11.4 C143.2@53,11.4
  Top Layer w0.1: U2.13@26.5,11.35 26.7,11.15 26.7,11 27.6,10.55
  Top Layer w0.105: 36.65,9.47 37.93,9.47
  Top Layer w0.11: U2.25@31.8,8.6 32,8.85
  Top Layer w0.13: U2.35@37.85,10.85 38.14,10.6 38.14,9.95
  Top Layer w0.14: 23.57,11.75 23.57,11.95 LD1.K@23.76,12.2 ; 38.14,9.95 38.18,9.78
  Top Layer w0.145: 32,8.85 v1(32.475,9.025)
  Top Layer w0.15: v1(23.25,10.575) 23.15,10.9 23.15,11.6 23.57,11.75 ; v1(41.4,6.9) U1.W1@41.9,7.4 ; U1.C3@42.9,15.4 v1(43.4,14.9) ; v1(44.4,13.9) U1.G7@44.9,13.4 ; v1(45.9,14.9) U1.C10@46.4,15.4 ; U1.N13@47.9,10.4 v1(48.4,9.9) ; v1(48.9,13.9) 49.4,14.4
  Top Layer w0.18: U2.47@37.85,16.85 38.175,17.125
  Top Layer w0.2: v1(40.9,13.4) U1.G1@41.9,13.4 ; v1(41.4,14.4) U1.E1@41.9,14.4 ; v1(41.4,15.4) U1.C1@41.9,15.4 ; v1(41.4,15.9) U1.B1@41.9,15.9 ; v1(41.4,16.4) U1.A1@41.9,16.4 U1.B1@41.9,15.9 ; v1(43.4,14.4) U1.E3@42.9,14.4 ; v1(43.9,14.9) U1.C5@43.9,15.4 ; U1.U6@44.4,8.4 v1(44.4,8.9) ; v1(44.4,12.9) U1.H7@44.9,12.9 ; v1(44.4,13.4) U1.G7@44.9,13.4 ; v1(44.4,14.9) U1.C6@44.4,15.4 ; v1(44.9,13.9) U1.G7@44.9,13.4 ; v1(45.4,13.9) U1.G8@45.4,13.4 ; U1.U9@45.9,8.4 v1(45.9,8.9) ; v1(45.9,9.9) U1.M9@45.9,10.9 U1.L9@45.9,11.4 ; v1(45.9,13.9) U1.G9@45.9,13.4 ; U1.A9@45.9,16.4 U1.B9@45.9,15.9 U1.C10@46.4,15.4 U1.B11@46.9,15.9 U1.A11@46.9,16.4 ; U1.L11@46.9,11.4 v1(46.9,11.9) U1.J11@46.9,12.4 ; v1(46.9,13.9) U1.G11@46.9,13.4 U1.H11@46.9,12.9 ; v1(47.4,6.25) U1.W12@47.4,7.4 ; v1(47.4,9.9) U1.N12@47.4,10.4 U1.N13@47.9,10.4 ; v1(47.9,9.9) U1.N13@47.9,10.4 ; U1.M13@47.9,10.9 U1.N13@47.9,10.4 ; v1(48.4,10.4) U1.N13@47.9,10.4 ; 49.4,14.4 U1.E17@49.9,14.4 ; U1.T19@50.9,8.9 v1(51.9,8.9) ; U1.L19@50.9,11.4 v1(51.4,11.4) ; U1.F19@50.9,13.9 v1(51.4,13.9) ; U1.C19@50.9,15.4 v1(51.4,15.4) ; U1.A19@50.9,16.4 v1(51.4,16.4) ; U1.E1@41.9,14.4 U1.F1@41.9,13.9 U1.F2@42.4,13.9 U1.F3@42.9,13.9 U1.E3@42.9,14.4 ; U1.E1@41.9,14.4 U1.E2@42.4,14.4 U1.E3@42.9,14.4 ; U1.C1@41.9,15.4 U1.C2@42.4,15.4 U1.C3@42.9,15.4 ; U1.C1@41.9,15.4 U1.B1@41.9,15.9 ; U1.E3@42.9,14.4 U1.D3@42.9,14.9 ; U1.D3@42.9,14.9 U1.C3@42.9,15.4 ; U1.D3@42.9,14.9 v1(43.4,14.9) U1.C4@43.4,15.4 ; U1.C3@42.9,15.4 U1.B3@42.9,15.9 ; U1.C3@42.9,15.4 U1.C4@43.4,15.4 ; U1.B3@42.9,15.9 U1.B4@43.4,15.9 ; U1.B3@42.9,15.9 U1.A3@42.9,16.4 U1.A4@43.4,16.4 ; U1.C4@43.4,15.4 U1.B4@43.4,15.9 ; U1.C4@43.4,15.4 U1.C5@43.9,15.4 ; U1.B4@43.4,15.9 U1.B5@43.9,15.9 ; U1.B4@43.4,15.9 U1.A4@43.4,16.4 ; U1.A4@43.4,16.4 U1.A5@43.9,16.4 ; U1.C5@43.9,15.4 U1.B5@43.9,15.9 ; U1.C5@43.9,15.4 U1.C6@44.4,15.4 ; U1.B5@43.9,15.9 U1.B6@44.4,15.9 ; U1.B5@43.9,15.9 U1.A5@43.9,16.4 ; U1.A5@43.9,16.4 U1.A6@44.4,16.4 ; U1.C6@44.4,15.4 U1.B6@44.4,15.9 ; U1.C6@44.4,15.4 U1.C7@44.9,15.4 U1.B7@44.9,15.9 ; U1.B6@44.4,15.9 U1.B7@44.9,15.9 ; U1.B6@44.4,15.9 U1.A6@44.4,16.4 ; U1.A6@44.4,16.4 U1.A7@44.9,16.4 U1.B7@44.9,15.9 ; U1.H7@44.9,12.9 U1.H8@45.4,12.9 ; U1.H7@44.9,12.9 U1.G7@44.9,13.4 ; U1.G7@44.9,13.4 U1.G8@45.4,13.4 ; U1.J8@45.4,12.4 U1.J9@45.9,12.4 ; U1.J8@45.4,12.4 U1.H8@45.4,12.9 ; U1.J8@45.4,12.4 U1.K8@45.4,11.9 U1.L8@45.4,11.4 U1.L9@45.9,11.4 ; U1.H8@45.4,12.9 U1.G8@45.4,13.4 ; U1.H8@45.4,12.9 U1.H9@45.9,12.9 ; U1.G8@45.4,13.4 U1.G9@45.9,13.4 ; U1.L9@45.9,11.4 v1(45.9,11.9) U1.J9@45.9,12.4 ; U1.J9@45.9,12.4 U1.H9@45.9,12.9 ; U1.H9@45.9,12.9 U1.G9@45.9,13.4 ; U1.J11@46.9,12.4 U1.J12@47.4,12.4 U1.H12@47.4,12.9 U1.H11@46.9,12.9 ; U1.J11@46.9,12.4 U1.H11@46.9,12.9
  Top Layer w0.21: 38.175,17.125 38.175,18.2
  Top Layer w0.22: U2.13@25.775,11.35 U2.13@26.5,11.35
  Top Layer w0.24: v1(36.1,8.7) 36.65,9.47
  Top Layer w0.245: 34.225,20.32 34.7,20.32 X1.MH2@35.52,21.258
  Top Layer w0.26: v1(25.1,20.8) 25.1,17.35 U2.1@25.775,17.35 ; U2.11@26.5,12.35 v1(27.025,12.125)
  Top Layer w0.27: U2.25@31.725,7.9 U2.25@31.8,8.6
  Top Layer w0.28: LD1.K@23.76,12.2 LD1.K@24.15,12.585 ; U2.15@25.775,10.35 26.5,10.35 26.975,10.15 v1(26.975,9) ; U2.11@25.775,12.35 U2.11@26.5,12.35 ; U2.10@25.775,12.85 26.5,12.85 v1(27.025,12.125) ; 27.6,10.55 27.6,9.3 v1(28.4,9.05) ; U2.51@34.225,19.3 34.225,20.32 ; U2.35@37.175,10.85 U2.35@37.85,10.85 ; U2.47@37.175,16.85 U2.47@37.85,16.85 ; 38.175,18.2 v1(38.35,18.4)
  Top Layer w0.3: v1(17.525,16.725) C158.1@18.1,16.95 ; C159.1@23.6,7.5 v1(23.6,7.95) ; C155.1@26.3,20.25 v1(26.3,20.675) ; C157.1@39.35,18 v1(39.35,18.425) ; v1(43.175,18.125) U4.4@43.85,17.495
  Top Layer w0.365: Q1.2@40.45,18.65 v1(41.5,19.85)
  Top Layer w0.38: v1(14.025,17.06) X3.G4@14.025,18.125
  Top Layer w0.4: v1(12.975,7.1) X3.G1@14.025,6.775 ; X1.MH1@30.52,21.258 X1.5@31.72,21.258
  Top Layer w0.425: v1(51.9,6.4) 52,7.2
  Top Layer w0.43: C93.2@53,17.449 v1(53.85,18.4)
  Top Layer w0.465: v1(51.9,13.15) 51.95,13.45
  Top Layer w0.5: X3.G3@5.775,18.475 v1(6.15,17.75) ; X3.G2@6.425,6.525 v1(6.425,7.225) ; X3.6@14.15,10.175 v1(15.325,10.175) ; LD1.K@24.15,12.585 LD2.K@24.15,13.785 ; X1.MS1@29.52,23.958 X1.MP1@29.82,23.958 X1.MP2@32.02,23.958 ; v1(32.55,2.25) X4.2@33.4,3.05 ; X1.MP3@34.02,23.958 X1.MP4@36.22,23.958 X1.MS2@36.52,23.958 ; 51.95,13.45 C146.2@53,14.149 ; 52,7.2 C140.2@53,7.55 C141.2@54.8,7.55 C142.2@56.6,7.55 ; C143.2@53,10.849 C145.2@56.6,10.849 v1(57.65,10.6) ; C85.2@54.8,14.149 C86.2@56.6,14.149 v1(57.65,14.149) ; C97.2@54.8,17.449 v1(54.8,18.4) ; C98.2@56.6,17.449 v1(56.6,18.4)
  L4-SIG w0.3: v1(9.8,9.7) v1(12.98,8.6)
  Bottom Layer w0.076: X2.20@1.27,24.13 1.27,23.317 1.75,22.837 v1(1.75,22.25) 1.75,21.968 ; C13.1@1.75,21.44 1.75,21.968 ; v1@4.648,8.87 4.648,5.997 ; v1@4.648,9.31 v1@4.648,9.322 ; C11.1@4.65,21.39 4.65,21.946 ; v1@5.968,15.545 5.156,15.545 ; C147.1@6.348,12.651 6.348,15.037 5.891,15.494 5.105,15.494 ; v1@6.848,15.545 v1@11.05,15.545 ; C12.1@6.95,21.39 6.95,21.955 6.502,22.403 5.107,22.403 4.65,21.946 ; C149.1@9.749,13.35 12.192,13.35 ; v1(12.065,14.757) 12.395,14.757 12.598,14.554 ; v1(12.802,12.852) v1(12.802,12.878) ; C9.1@17.75,4.25 17.75,4.343 R102.1@15.151,4.343 ; C133.1@22.15,3.95 21.858,3.658 21.692,3.658 ; v1(26.441,21.819) 26.441,22.505 U10.5@27.215,22.505 29.29,22.505 29.85,21.946 C156.1@29.85,20 ; C4.1@27.95,3.05 27.95,2.535 27.838,2.423 26.584,2.423 25.694,3.313 25.349,3.658 24.842,3.658 C135.1@24.55,3.95 24.384,4.116 24.384,4.191 24.282,4.293 23.571,4.293 23.35,4.072 C139.1@23.35,3.05 23.35,2.395 22.758,1.803 22.315,1.803 21.59,2.529 21.59,3.556 21.692,3.658 ; U3.41@28.35,17.53 28.35,16.024 28.854,15.519 36.297,15.519 37.592,16.815 37.592,18.11 ; v1(28.854,20.93) 28.92,20.93 C156.1@29.85,20 ; v1(29.82,9.042) 29.82,8.382 29.54,8.103 29.54,4.141 C152.1@29.349,3.95 29.642,3.658 32.664,3.658 32.868,3.861 32.868,4.699 32.715,4.851 32.41,4.851 31.979,5.283 31.979,8.738 32.512,9.271 34.138,9.271 34.468,8.941 34.468,5.204 ; U3.46@32.35,17.53 32.35,17.958 31.979,18.329 31.979,19.38 31.699,19.66 30.785,19.66 30.444,20 C156.1@29.85,20 ; U3.6@34.75,6.17 34.75,5.486 34.468,5.204 ; C8.1@37.15,3.05 37.15,3.668 36.576,4.242 35.687,4.242 35.103,3.658 34.441,3.658 C40.1@34.149,3.95 ; U3.52@37.15,17.53 37.15,17.907 37.389,17.907 37.592,18.11 ; v1(37.821,23.241) 37.821,23.038 37.592,22.809 37.592,22.428 ; v1(37.897,21.514) 37.897,21.336 37.795,21.336 37.592,21.133 ; R13.2@41.95,3.95 42.242,3.658 43.458,3.658 R15.1@43.75,3.95 ; C100.2@42.05,21.1 C106.2@42.05,21.933 ; C113.2@42.75,7.65 43.1,7.3 ; C117.2@44.97,17.85 45.747,17.85 46.191,17.406 46.746,17.406 C116.2@47.19,17.85 47.514,17.526 48.505,17.526 48.529,17.55 49.11,17.55 C118.2@49.41,17.85 ; v1(45.847,6.375) 45.771,6.452 43.948,6.452 43.823,6.577 ; v1(48.26,2.286) 47.498,3.048 46.248,3.048 R11.1@45.95,2.75 46.247,3.047 46.278,3.047 46.482,3.251 46.482,5.766 45.86,6.388 45.669,6.579 43.821,6.579 43.1,7.3 ; R21.1@50.25,4.25 v1(50.25,4.975) 50.25,6.981 49.581,7.65 C110.2@49.41,7.65 49.075,7.315 47.525,7.315 C107.2@47.19,7.65 47.19,7.007 46.76,6.577 43.823,6.577 ; v1(53.391,0.889) 53.254,1.026 53.254,1.72 53.682,2.148 53.682,3.689 53.746,3.753 R22.1@53.55,3.95 53.842,4.242 54.432,4.242 54.432,3.48 55.651,2.261 60.249,2.261 60.833,2.845 60.833,4.597 61.697,5.461 61.697,7.036 61.112,7.62 61.112,8.941 60.604,9.449 ; C122.2@53.85,7.65 55.649,9.449 ; C119.2@53.85,11.05 54.407,11.607 ; v1(56.998,20.32) 57.346,20.32 57.549,20.523 C105.2@57.549,21.1 ; v1(59.792,14.808) 59.436,14.453 ; R5.1@60.8,14.17 60.52,14.45 57.25,14.45 ; v1(61.722,9.449) 55.649,9.449 ; 1.75,21.968 2.032,22.25 4.345,22.25 4.65,21.946 ; 4.648,5.997 v1@4.648,9.322 ; 4.648,5.997 6.2,4.445 R78.1@6.2,3.9 ; v1@4.648,9.322 4.648,14.952 4.648,15.037 5.105,15.494 ; v1@4.648,9.322 5.154,8.816 C82.1@5.154,7.059 5.154,4.436 5.69,3.9 R78.1@6.2,3.9 ; 5.105,15.494 5.156,15.545 ; 5.105,15.494 5.156,15.545 ; 5.156,15.545 v1@11.05,15.545 ; R78.1@6.2,3.9 6.2,3.249 6.502,2.946 8.158,2.946 8.611,3.399 C151.1@9.8,3.399 9.8,3.962 11.121,5.283 12.065,5.283 12.421,4.928 12.522,4.928 12.802,4.648 12.802,4.369 13.411,3.759 13.9,3.759 14.001,3.658 R106.1@14.001,3.147 14.514,3.147 15.151,3.785 R102.1@15.151,4.343 ; v1@11.05,15.545 12.192,15.545 C84.1@12.598,15.138 ; 12.192,13.35 12.598,13.756 12.598,14.554 ; 12.192,13.35 12.329,13.35 12.495,13.185 v1(12.802,12.878) ; 12.598,14.554 C84.1@12.598,15.138 ; C84.1@12.598,15.138 12.802,14.935 12.802,13.73 v1(12.802,12.878) ; R102.1@15.151,4.343 R102.1@15.151,4.348 R105.1@15.151,5.55 15.151,5.588 15.945,5.588 16.453,6.096 R104.1@16.453,6.752 16.861,6.752 17.094,6.985 18.186,6.985 18.364,6.807 18.364,5.438 18.974,4.828 20.05,4.828 R18.1@20.05,4.25 20.05,3.759 20.152,3.658 21.692,3.658 ; C40.1@34.149,3.95 34.468,4.269 34.468,5.204 ; C40.1@34.149,3.95 34.149,4.886 34.468,5.204 ; 37.592,18.11 37.592,21.133 ; 37.592,21.133 37.592,22.428 ; 37.592,22.428 38.202,23.038 40.945,23.038 C106.2@42.05,21.933 ; C106.2@42.05,21.933 C106.2@42.05,22.4 42.05,22.466 42.672,23.089 44.704,23.089 C87.2@45.15,22.643 ; 43.1,7.3 43.823,6.577 ; C87.2@45.15,22.073 C87.2@45.15,22.4 C87.2@45.15,22.643 ; C87.2@45.15,22.073 C101.2@45.15,21.1 44.755,21.1 44.755,21.678 C87.2@45.15,22.073 ; C87.2@45.15,22.643 45.15,23.038 47.564,23.038 C88.2@48.249,22.352 ; C88.2@48.249,22.073 C88.2@48.249,22.352 ; C88.2@48.249,22.073 C102.2@48.249,21.1 47.854,21.1 47.854,21.677 C88.2@48.249,22.073 ; C88.2@48.249,22.352 C88.2@48.249,22.4 48.249,24.551 48.768,25.07 49.876,25.07 51.349,23.597 51.349,22.962 ; C94.2@51.349,22.4 51.349,22.962 ; C94.2@51.349,22.4 C103.2@51.349,21.1 51.308,21.1 51.308,22.4 C94.2@51.349,22.4 ; 51.349,22.962 51.553,23.165 54.043,23.165 54.449,22.758 C99.2@54.449,22.4 C99.2@54.449,22.123 ; 54.407,11.607 57.25,14.45 ; 54.407,11.607 54.407,13.893 C121.2@53.85,14.45 57.25,14.45 ; C99.2@54.449,22.123 C104.2@54.449,21.1 54.051,21.1 54.051,21.725 C99.2@54.449,22.123 ; 55.649,9.449 59.741,9.449 60.198,9.906 60.198,13.995 59.741,14.453 59.436,14.453 ; 57.25,14.45 57.253,14.453 59.436,14.453
  Bottom Layer w0.1: 21.6,3.45 21.6,3.65 22.15,3.65 C133.1@22.15,3.95 ; C135.1@24.55,3.95 24.55,3.65 25.75,3.65 26.95,3.65 C137.1@26.95,3.95 ; C152.1@29.349,3.95 29.35,3.65 30.5,3.65 31.75,3.65 C154.1@31.749,3.95
  Bottom Layer w0.105: R11.1@45.95,2.75 v1(46.575,3.225)
  Bottom Layer w0.11: 41.425,10.675 42.275,10.675 ; 43.8,7.3 43.8,6.55 45.65,6.55 v1(45.75,6.45)
  Bottom Layer w0.115: 29.54,4.3 29.54,5.55
  Bottom Layer w0.13: 29.54,5.55 U3.12@29.95,6.17 ; C154.1@31.749,3.95 C6.1@32.55,3.05 ; v1(40.9,10.15) 41.125,10.375
  Bottom Layer w0.145: 42.275,10.675 42.45,10.75
  Bottom Layer w0.15: v1(21.6,2.316) 21.6,3.45 ; v1(44.4,10.4) 44.97,10.4 C90.2@44.97,11.05 ; v1(44.9,13.9) C96.2@44.97,14.45 ; C92.2@45.6,14.45 v1(45.9,13.9) ; C89.2@47.19,11.05 47.4,10.84 v1(47.4,9.9) ; v1(48.4,11.4) 49.41,11.4 C91.2@49.41,11.05 ; v1(48.9,13.9) C95.2@49.41,14.45
  Bottom Layer w0.16: 43.8,7.3 44.97,7.3
  Bottom Layer w0.18: 42.45,10.75 C108.2@42.75,11.05
  Bottom Layer w0.205: 37.15,18.26 v1(37.775,18.475)
  Bottom Layer w0.21: C106.2@42.55,22.85 43,23.35 ; 44.97,7.3 C109.2@44.97,7.65 ; 49.25,6.8 49.25,7.3
  Bottom Layer w0.23: v1(25.6,1.8) C3.1@25.65,3.05 ; C40.1@34.149,3.95 C7.1@34.85,3.05
  Bottom Layer w0.24: 9.5,6.65 10.45,6.65 ; U8.6@10.1,5.65 10.45,5.65 ; U8.4@10.75,4.5 10.75,4.95
  Bottom Layer w0.255: C152.1@29.349,3.95 29.54,4.3
  Bottom Layer w0.26: C7.1@34.85,3.05 C41.1@35.349,3.95
  Bottom Layer w0.265: 53.55,4.22 v1(54.3,4.8)
  Bottom Layer w0.28: 49.25,7.3 49.41,7.45
  Bottom Layer w0.29: v1(46.575,3.225) R17.2@46.75,3.95
  Bottom Layer w0.295: v1(46.575,3.225) 47.3,3.05
  Bottom Layer w0.3: v1(5.535,3.9) R78.1@6.2,3.9 ; v1(10.15,4.55) U8.4@10.75,4.5 ; R106.1@14.001,3.147 v1(14.667,3.147) ; R103.1@14.1,10.1 C150.1@14.001,8.7 v1(15.3,8.6) ; R102.1@15.151,4.348 v1(15.816,4.348) ; R105.1@15.151,5.55 v1(15.816,5.55) ; R104.1@16.453,6.752 v1(17.103,6.752) ; C139.1@23.35,3.05 C134.1@23.35,3.95 ; v1(25.4,1.2) v1(25.6,1.8) ; C3.1@25.65,3.05 25.75,3.65 C136.1@25.75,3.95 ; C4.1@27.95,3.05 C138.1@28.15,3.95 ; v1(29.525,20.4) C156.1@29.85,20 ; C5.1@30.25,3.05 30.5,3.65 C153.1@30.549,3.95 ; v1(32.4,1.575) v1(32.55,2.25) ; C6.1@32.55,3.05 C38.1@32.949,3.95 ; U3.52@37.15,17.53 37.15,18.26 ; v1(38.35,18.4) U3.54@38.75,17.53 ; 41.125,10.375 41.425,10.675 ; C106.2@42.05,22.4 C106.2@42.55,22.85 ; C113.2@42.75,7.65 42.75,7.3 43.8,7.3 ; C112.2@42.75,14.45 v1(43.4,14.4) ; C120.2@42.75,17.85 v1(43.175,18.125) ; 43,23.35 v1(43.18,23.6) ; C117.2@44.97,17.85 v1(44.975,18.3) ; C107.2@47.19,7.65 47.4,7 v1(47.4,6.25) ; C116.2@47.19,17.85 v1(47.2,18.3) ; v1(49.05,6.6) 49.25,6.8 ; 49.41,7.45 C110.2@49.41,7.65 ; C118.2@49.41,17.85 v1(49.85,17.85) ; v1(51.4,11.4) C111.2@51.63,11.05 ; v1(51.4,13.9) C114.2@51.63,14.45 ; C115.2@51.63,7.65 v1(51.9,8.1) ; R22.1@53.55,3.95 53.55,4.22 ; C122.2@53.85,7.65 v1(58.45,7.65) ; C119.2@53.85,11.05 v1(57.65,11.05) ; C121.2@53.85,14.45 v1(57.65,14.6) ; v1(60.1,14.17) R5.1@60.8,14.17
  Bottom Layer w0.36: R18.1@20.05,4.25 v1(20.7,3.85)
  Bottom Layer w0.37: 17.95,16.7 v1(18.56,16.18)
  Bottom Layer w0.38: C12.1@6.95,21.39 v1(6.95,22.14)
  Bottom Layer w0.4: v1(3.907,13.952) C80.1@3.907,14.952 ; C82.1@5.154,7.059 v1(5.454,5.779) ; v1(8.92,3.1) C151.1@9.8,3.399 ; v1(8.92,3.75) C151.1@9.8,3.399 ; v1(9.8,2.58) C151.1@9.8,3.399 ; C78.1@9.8,8.651 v1(9.8,9.7) ; v1(10.15,4.55) C151.1@9.8,3.399 ; 10.45,5.65 U8.17@10.75,5.65 ; 10.45,6.65 10.75,6.65 U8.17@11.5,5.9 U8.17@10.75,5.65 ; 10.75,4.95 U8.17@10.75,5.65 ; v1(11.05,15.541) C84.1@12.15,15.541 ; v1(12.98,8.6) C150.1@14.001,8.7 ; v1(17.1,3.9) C9.1@17.75,4.25 ; v1(23.1,2.25) C139.1@23.35,3.05 ; v1(27.215,21.9) U10.5@27.215,22.505 ; C4.1@27.95,3.05 v1(28.52,2.43) ; v1(34.3,2) C7.1@34.85,3.05 ; C87.2@45.15,22.4 45.45,22.75 45.72,23.3 v1(45.72,23.6) ; v1(50.8,23.6) 50.8,23.3 51.05,22.75 C94.2@51.349,22.4
  Bottom Layer w0.41: v1(34.475,9) 34.475,7 U3.6@34.75,6.17
  Bottom Layer w0.45: 17.95,16.7 U3.28@17.95,17.53 ; v1(28.14,16.66) U3.41@28.35,17.53 ; v1(32.35,16.575) U3.46@32.35,17.53 ; v1(45.15,20.25) C101.2@45.15,21.1 ; 47.3,3.05 L6.1@48.05,3.05 ; v1(48.25,20.3) C102.2@48.249,21.1 ; C88.2@48.249,22.4 v1(48.26,23.6) ; R21.1@50.25,4.25 v1(50.25,4.975) ; v1(51.35,19.475) C103.2@51.349,21.1
  Bottom Layer w0.5: C13.1@1.75,21.44 v1(1.75,22.25) ; C80.1@3.907,14.952 3.907,15.502 v1(5.968,15.502) v1(6.408,15.502) ; C11.1@4.65,21.39 v1(4.65,22.15) ; v1(4.704,9.75) v1(4.704,9.31) ; C82.1@5.154,7.059 4.704,7.059 v1(4.704,8.87) v1(4.704,9.31) ; C147.1@6.348,12.651 U5.2@6.408,14.252 v1(6.408,15.502) ; v1(6.848,15.502) v1(6.408,15.502) ; C148.1@7.555,9.25 U6.2@5.954,9.31 v1(4.704,9.31) ; 9.5,6.65 v1(9.5,7.35) 9.5,8.651 C78.1@9.8,8.651 ; C149.1@9.749,13.35 U7.2@11.35,13.29 v1(12.6,13.29) ; C84.1@12.15,15.541 12.6,15.541 v1(12.6,13.73) v1(12.6,13.29) ; v1(12.6,12.85) v1(12.6,13.29) ; X1.MH1@30.52,21.258 R86.1@31.9,21.45 ; v1(32.55,2.25) C6.1@32.55,3.05 ; C8.1@37.15,3.05 v1(37.15,4) ; C100.2@42.05,21.1 C106.2@42.05,22.4 ; C104.2@54.449,21.1 v1(54.45,20.3) ; C99.2@54.449,22.4 v1(55.45,23) ; C105.2@57.549,21.1 v1(57.55,20.3)
GNDADC: C123.2 C124.2 L6.2 U1.A12 U1.A13 U1.B12 U1.B13 U1.C12 | length 24.2
  Top Layer w0.15: v1(46.9,14.9) U1.C12@47.4,15.4
  Top Layer w0.2: U1.C12@47.4,15.4 U1.B12@47.4,15.9 ; U1.B12@47.4,15.9 U1.B13@47.9,15.9 U1.A13@47.9,16.4 U1.A12@47.4,16.4 U1.B12@47.4,15.9
  L3-SIG w0.15: 48.1,7.35 48.1,5.75 48.35,5.4 v1(48.35,5)
  L3-SIG w0.16: 48.1,7.35 48.1,7.7 50.68,7.7
  L3-SIG w0.2: v1(46.9,14.9) 46.9,15.8 50.68,15.8 50.68,7.7
  Bottom Layer w0.285: v1(48.35,5) C124.2@49.25,4.25
  Bottom Layer w0.3: C123.2@46.85,14.45 v1(46.9,14.9)
  Bottom Layer w0.4: C124.2@49.25,4.25 L6.2@49.65,3.05
JA1: R26.1 U1.U18 | length 1.7
  Top Layer w0.076: U1.U18@50.4,8.4 50.65,8.65 51.113,8.65
  Bottom Layer w0.076: R26.1@62.85,5.65 62.85,5.442 v1(63.348,4.944)
JA2: R27.1 U1.U19 | length 0.7
  Bottom Layer w0.076: R27.1@58.75,8.49 59.131,8.109 v1(59.131,7.987)
JA3: R28.1 U1.G17 | length 33.4
  Top Layer w0.076: v1(49.4,13.4) U1.G17@49.9,13.4
  L3-SIG w0.076: v1(49.4,13.4) 49.708,13.092 49.708,8.534 49.454,8.28 47.625,8.28 47.119,7.775 47.119,6.524 47.092,6.496 47.092,4.898 47.321,4.668 47.321,3.911 47.955,3.277 50.342,3.277 51.129,2.491 51.129,0.813 51.586,0.356 53.442,0.356 53.694,0.608 53.694,1.649 56.032,3.988 58.191,3.988 58.903,4.699 v1(58.903,6.593)
  Bottom Layer w0.076: v1(58.903,6.593) R28.1@60.8,8.49
JA4: R29.1 U1.C17 | length 20.7
  Top Layer w0.076: U1.C17@49.9,15.4 50.15,15.65 v1(50.15,16.78)
  Bottom Layer w0.076: v1(50.15,16.78) 50.31,16.94 54.374,16.94 56.023,15.291 60.96,15.291 61.172,15.079 61.172,14.436 61.112,14.376 61.112,13.792 62.56,12.344 62.56,8.78 R29.1@62.85,8.49
JA7: R30.2 U1.T17 | length 12.4
  Top Layer w0.076: v1(49.4,8.9) U1.T17@49.9,8.9
  Bottom Layer w0.076: v1(49.4,8.9) 49.715,8.585 52.197,8.585 53.772,10.16 57.76,10.16 57.963,10.363 57.963,11.074 58.522,11.633 59.047,11.633 R30.2@59.35,11.33
JA8: R31.2 U1.E19 | length 1.1
  Bottom Layer w0.076: R31.2@61.4,11.33 62.106,12.036 v1(62.243,12.036)
JA9: R32.2 U1.V19 | length 1.5
  Bottom Layer w0.076: R32.2@63.45,11.33 63.887,10.893 v1(63.887,10.015)
JA10: R33.2 U1.U17 | length 14.8
  Top Layer w0.076: U1.U17@49.9,8.4 50.15,8.15 v1(51.4,8.15)
  Bottom Layer w0.076: v1(51.4,8.15) 51.657,8.407 54.305,8.407 55.575,9.677 59.157,9.677 59.639,10.16 59.639,13.881 R33.2@59.35,14.17
LD5_K: LD5.K R78.2 | length 28.2
  Top Layer w0.076: 8.6,3.425 11.455,3.425 ; 21.8,11.825 22.3,11.972 23.35,11.972
  Top Layer w0.1: 11.455,3.425 11.455,11.825 21.8,11.825 ; 23.35,11.972 23.35,14.985 LD5.K@24.15,14.985
  Top Layer w0.15: v1(8.3,3.6) 8.6,3.425
  Bottom Layer w0.2: R78.2@7.5,3.9 v1(8.3,3.6)
LDQM: U1.W4 U3.15 | length 20.6
  Top Layer w0.076: v1(42.375,4.4) 43.4,6.55 U1.W4@43.4,7.4
  L4-SIG w0.125: v1(27.3,7.4) 29.05,5.65 41.625,5 42.05,4.75 v1(42.375,4.4)
  Bottom Layer w0.125: v1(27.3,7.4) 27.5,7.025 U3.15@27.55,6.17
LED0_B: LD0.2 U1.N19
LED0_G: LD0.6 U1.R18 | length 0.8
  Top Layer w0.076: U1.R18@50.4,9.4 50.65,9.65 51.113,9.65
LED0_R: LD0.4 U1.P19